# EAGLE board brick_i2c_temperature (EAGLE 7.4.0)
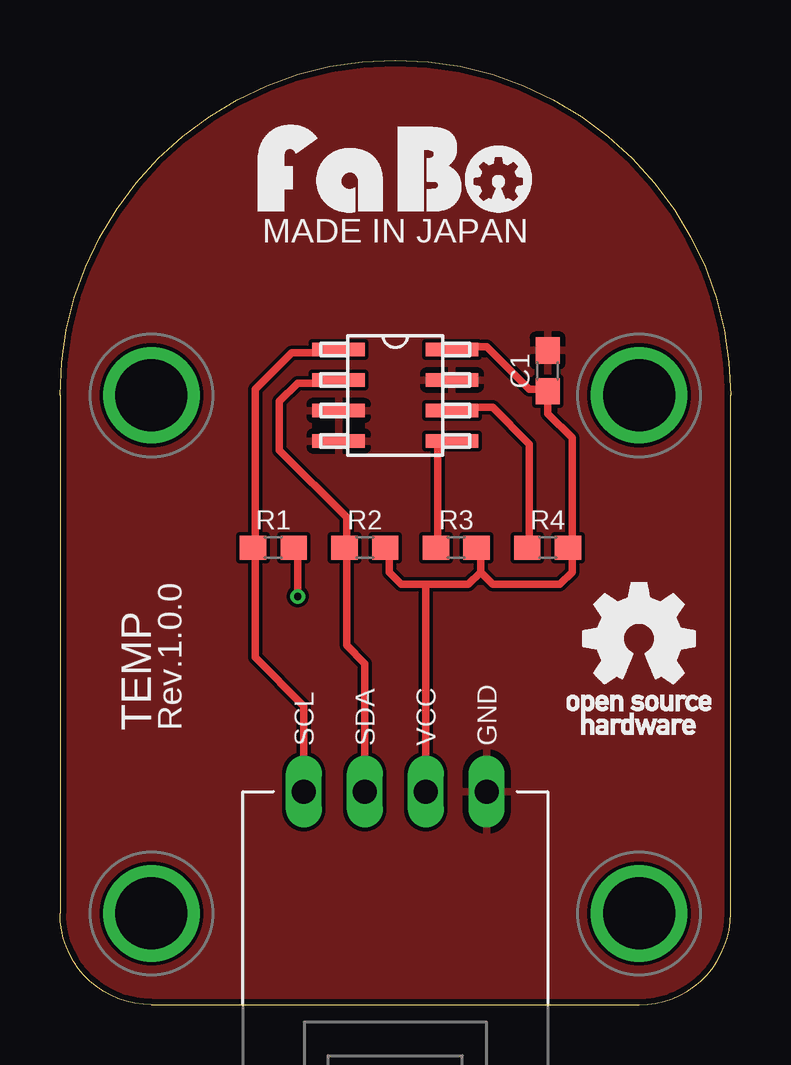
[diagram p0: board, top side]
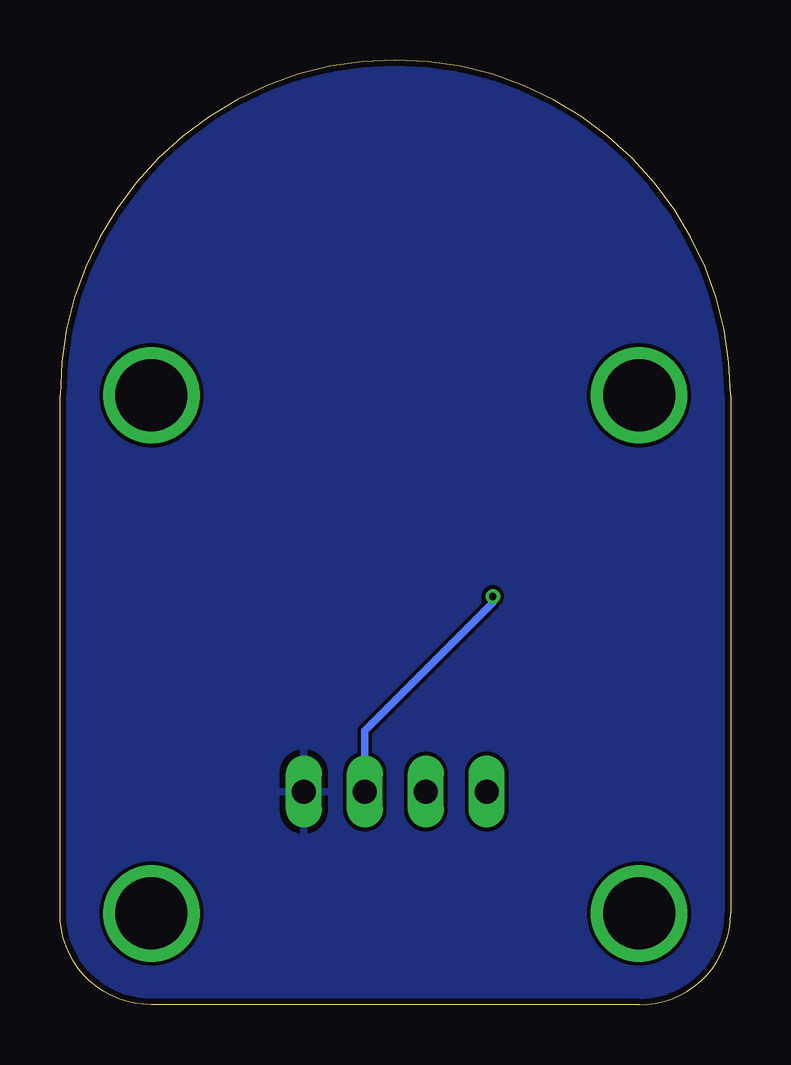
[diagram p1: board, bottom side, seen from below]

Size 27.94 x 39.37 mm. Coordinates in mm from the lower left corner, seen from the top.
Copper layers (1*16): Top 0.035mm / dielectric 1.5mm / Bottom 0.035mm
Design rules "Elecrow_2-layer_eagle_rule": minimum track width 6mil, minimum drill 12mil, track to track 6mil, track to pad 6mil, pad to pad 6mil, via to via 6mil, smd to smd 0mil, copper to edge 10mil, drill to drill 10mil, minimum pad ring 10mil, minimum via ring 6mil, stop-mask expansion 2mil, vias tented up to drill 100mil, thermal gap 10mil
Net classes: 0 default: width 0.305 mm

## Footprints (pad centres in the part's own frame; a part is rotated, then mirrored left to right if it is on the bottom)
EIA0603 = smd 1.1 x 1: 1 -0.85,0; 2 0.85,0
BRICK_I2C = drill 1 long: GND 3.81,-10.16; SCL -3.81,-10.16; SDA -1.27,-10.16; VCC 1.27,-10.16 | drill 3 pad 3.81: P$1 -10.16,6.35; P$2 10.16,6.35; P$3 -10.16,-15.24; P$4 10.16,-15.24
ADT7410 = smd 2.184 x 0.559: 1 -2.362,1.905; 2 -2.362,0.635; 3 -2.362,-0.635; 4 -2.362,-1.905; 5 2.362,-1.905; 6 2.362,-0.635; 7 2.362,0.635; 8 2.362,1.905

## Placement (x,y rotation side)
C1  0.1uF  [EIA0603]  20.32,26.42 90 top
J1  [BRICK_I2C]  13.97,19.05 0 top
R1  4.7k  [EIA0603]  8.89,19.05 0 top
R2  4.7k  [EIA0603]  12.7,19.05 0 top
R3  10k  [EIA0603]  16.51,19.05 0 top
R4  10k  [EIA0603]  20.32,19.05 0 top
U1  ANALOGDEVICES-ADT7410  [ADT7410]  13.97,25.4 0 top
U$1  [LOGO_FABO_M]  13.97,33.02 0 top
U$3  [LOGO_OSHW_T_M]  24.13,15.24 0 top

## Library data of the parts
C1 J1 R1-R4 U$3 = gclue
U1 = GClueSensor
U$1 = FaBo-etc

## Nets
GND: C1.2 J1.GND U1.3 U1.4 U1.7
N$1: R3.1 U1.5
N$2: R4.1 U1.6
SCL: J1.SCL R1.1 U1.1
SDA: J1.SDA R2.1 U1.2
VCC: C1.1 J1.VCC R1.2 R2.2 R3.2 R4.2 U1.8

## Tracks (layer width: path | path; a pad name or v marks a point on that pad's centre or on a via)
GND
  pour Bottom: -1.27,40.64 29.21,40.64 29.21,-1.27 -1.27,-1.27
  pour Top: -1.27,40.64 29.21,40.64 29.21,-1.27 -1.27,-1.27
N$1
  Top 0.305: R3.1 15.75,19.3 15.75,23.37 16.26,23.37 U1.5
N$2
  Top 0.305: R4.1 19.56,19.3 19.56,23.37 18.03,24.89 16.51,24.89 U1.6
SCL
  Top 0.305: U1.1 11.43,27.18 9.65,27.18 8.13,25.65 8.13,19.3 R1.1 8.13,18.8 8.13,14.48 10.16,12.45 J1.SCL
SDA
  Top 0.305: U1.2 11.43,25.91 9.91,25.91 9.14,25.15 9.14,23.11 11.94,20.32 11.94,19.3 R2.1 11.94,18.8 11.94,14.99 12.7,14.22 J1.SDA
VCC  (via drill 0.3)
  Top 0.305: 15.24,17.53 14.22,17.53 13.72,18.03 13.72,18.8 R2.2 | 17.53,18.03 17.02,17.53 15.24,17.53 | 17.53,18.03 18.03,17.53 20.83,17.53 21.34,18.03 21.34,18.8 R4.2 21.34,19.3 21.34,23.62 20.32,24.64 C1.1 20.07,25.65 19.56,25.65 17.78,27.43 16.51,27.43 U1.8 | 17.53,18.03 17.53,18.8 R3.2 | J1.VCC 15.24,17.53 | R1.2 9.91,19.05 v9.91,17.02
  Bottom 0.305: v9.91,17.02 9.91,16.76 15.24,11.43 J1.VCC

## Text on the board
tPlace: MADE IN JAPAN | TEMP | Rev.1.0.0